# Altium PCB ui_layout-v1.1.PcbDoc
Units mil, origin at the board's own origin, x right, y up, seen from the top; angles counter-clockwise.
Board outline 3110 x 1889.76 mil, 4 copper layers (Signal Layer 1, Power Plane, GND Plane, Signal Layer 2), stack 61.811 mil thick; 42 components, 47 nets, 155 pads, 83 vias.
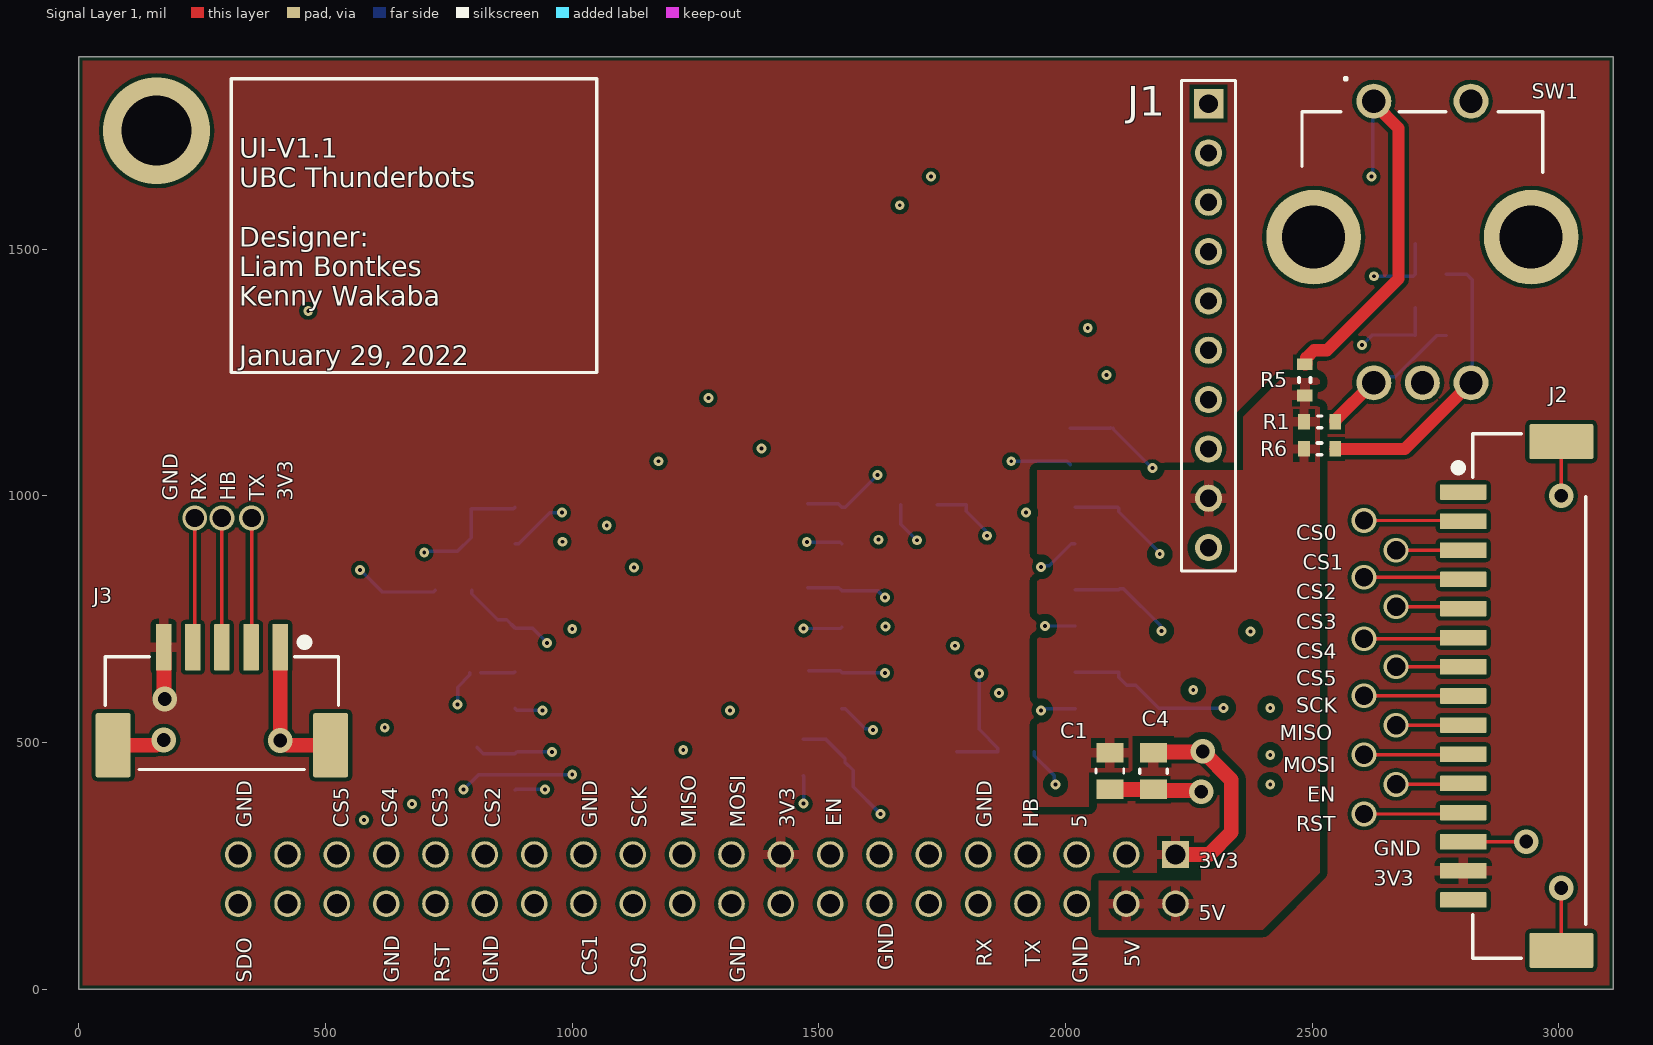
[diagram p0: Signal Layer 1 view]
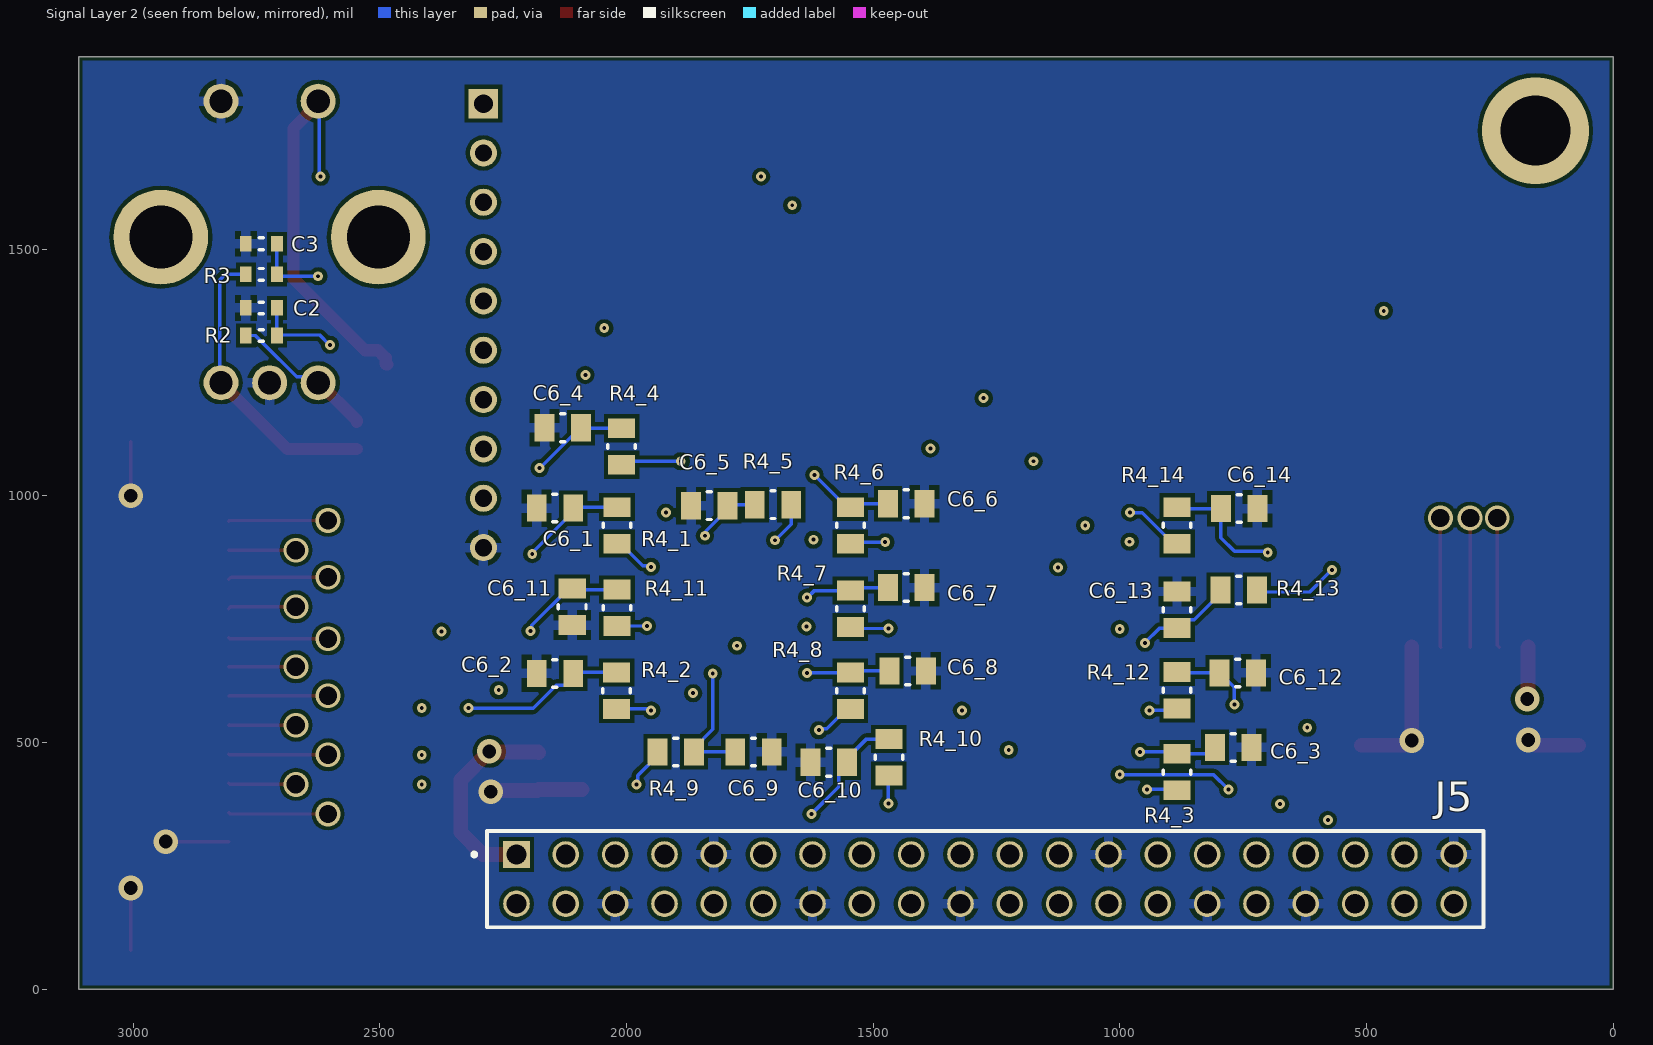
[diagram p1: Signal Layer 2 view, seen from below]
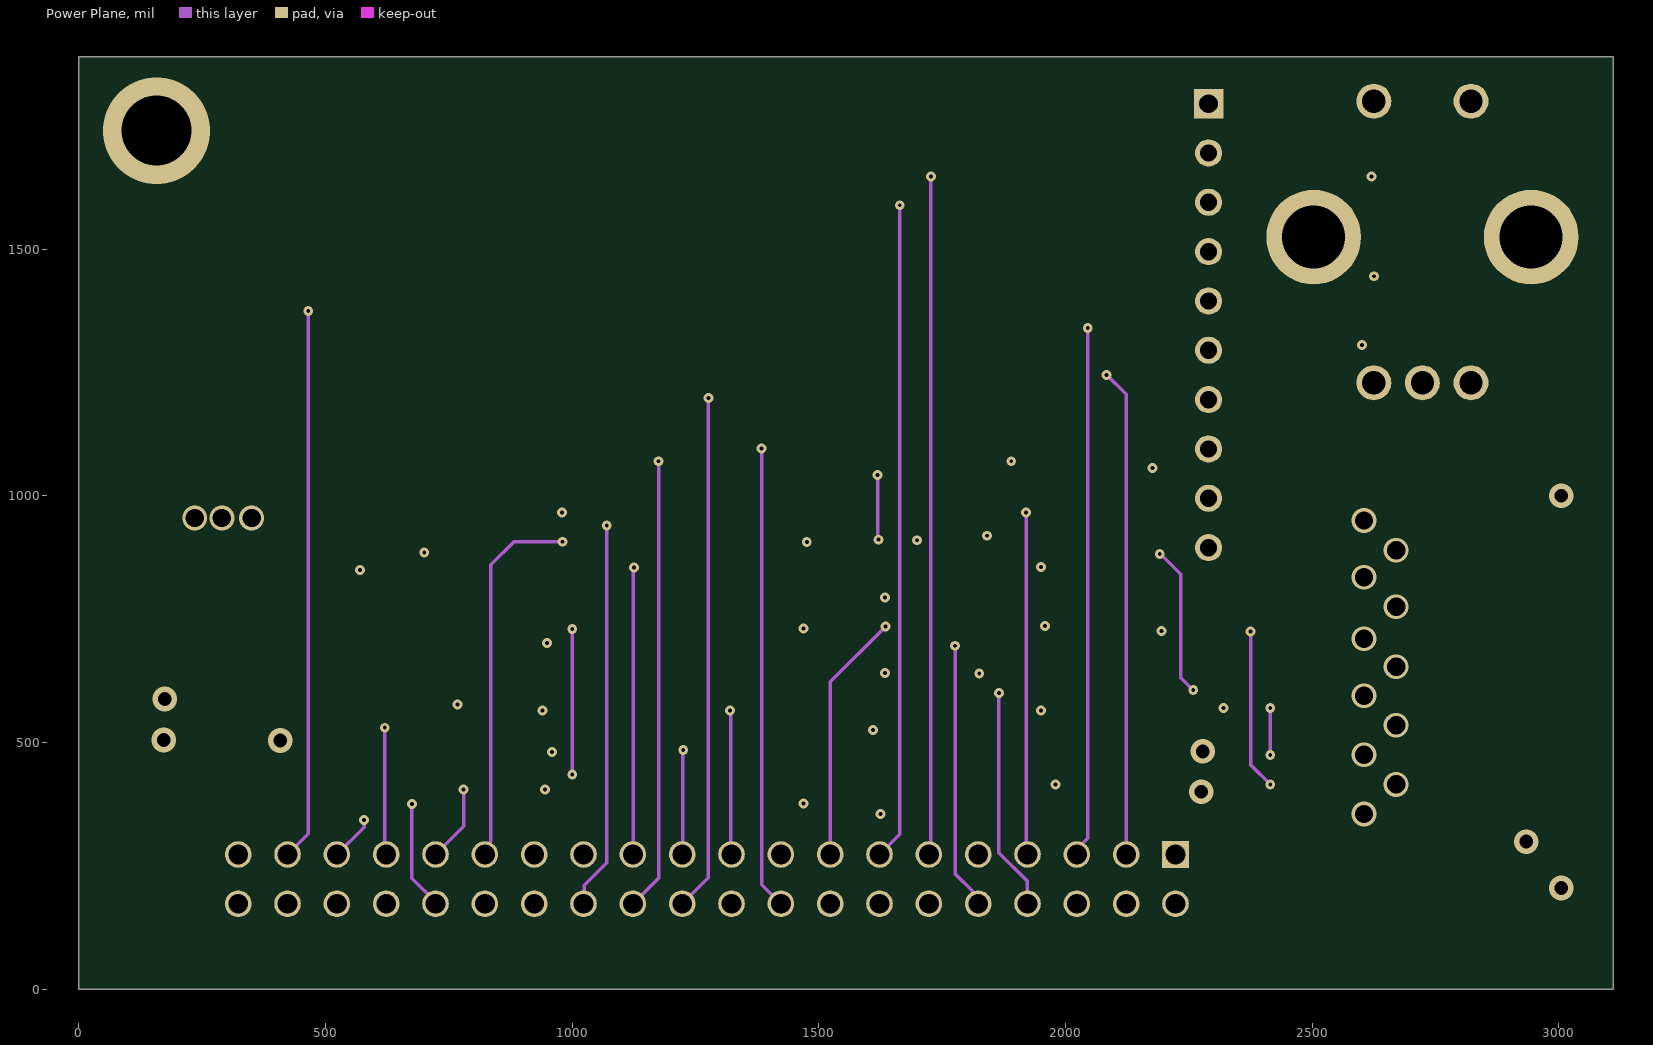
[diagram p2: Power Plane]
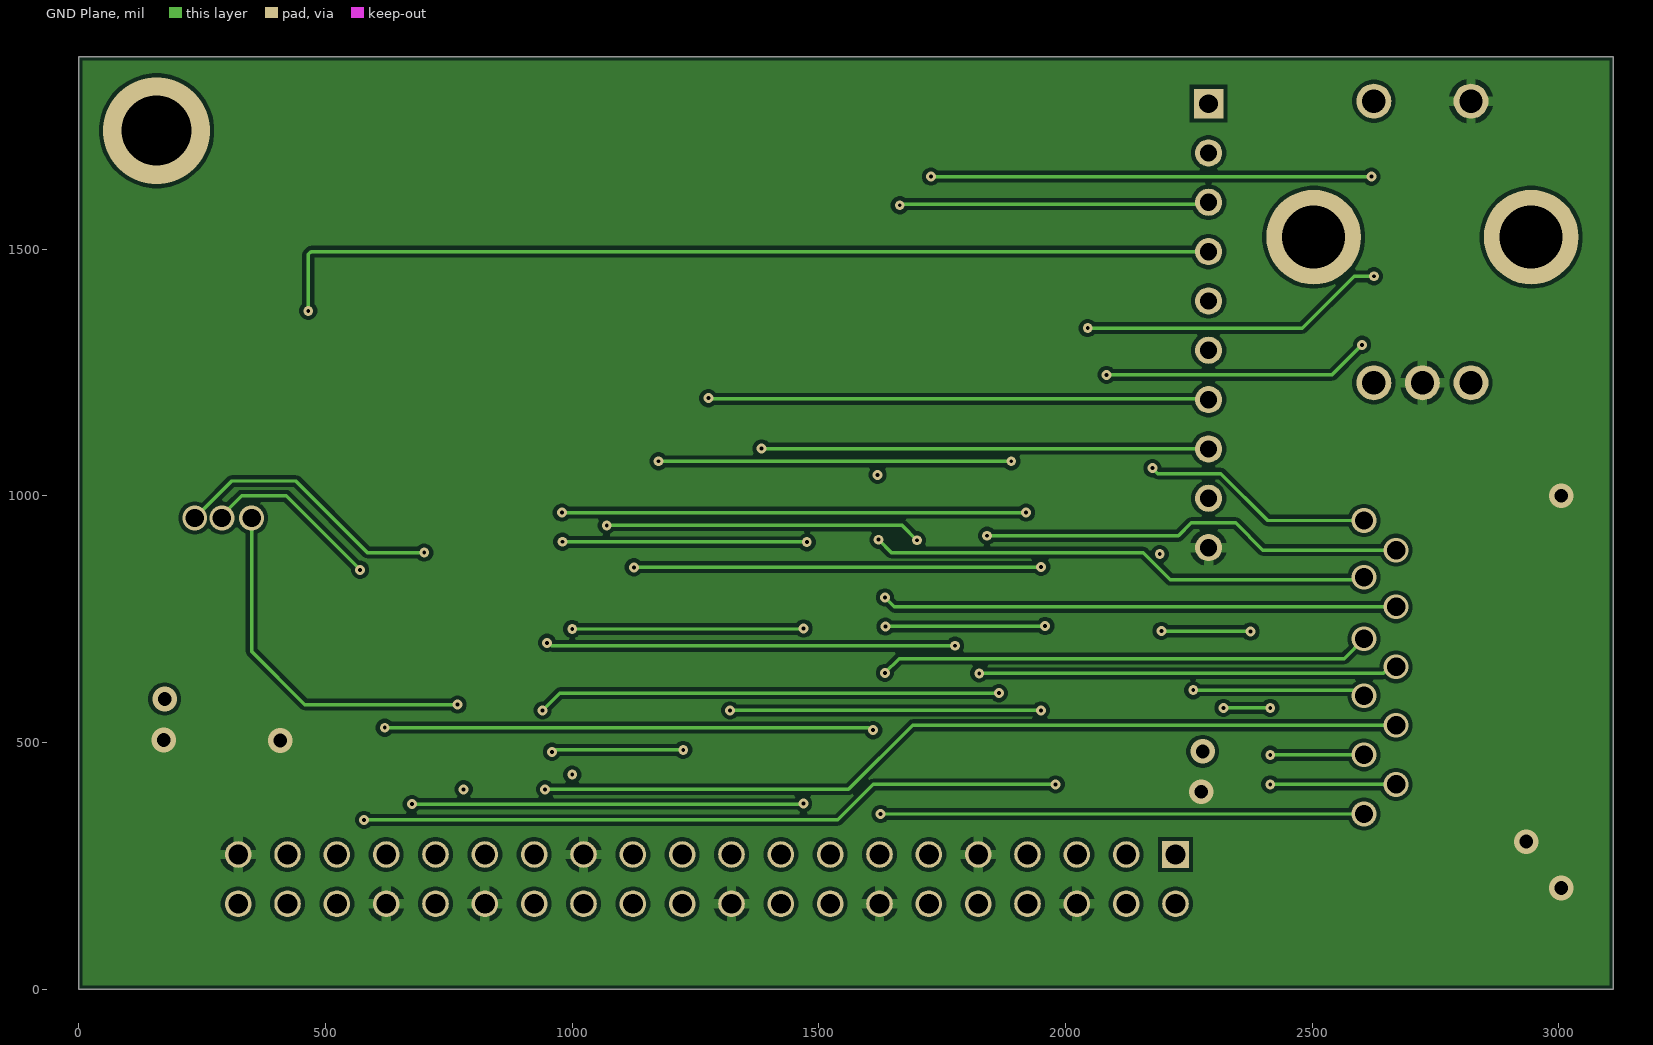
[diagram p3: GND Plane]

## Layer stack, top to bottom
Top Mask: solder mask 0.5906, Solder Resist, Dk 3.8
Signal Layer 1: signal copper 0.689
Dielectric 1: prepreg 3.937, 2313, Dk 4.05
Power Plane: signal copper 1.378
Core: core 49.8031, FR-4, Dk 4.5
GND Plane: signal copper 1.378
Dielectric 2: prepreg 3.937, 2313, Dk 4.05
Signal Layer 2: signal copper 0.689
Bottom Mask: solder mask 0.5906, Solder Resist, Dk 3.8

## Board outline
0,0 0,1889.76 3110,1889.76 3110,0

## Design rules (kind name [scope] priority, off if disabled: settings)
BoardOutlineClearance [All] p1: gap=7.87 ignorepadtopadclearanceinfootprint=FALSE except(15.75: Arc-SplitBarrior Arc-SplitContinuation Track-SplitBarrior Track-SplitContinuation SMDPad-SplitBarrior SMDPad-SplitContinuation THPad-SplitBarrior THPad-SplitContinuation Via-SplitBarrior Via-SplitContinuation Fill-SplitBarrior Fill-SplitContinuation Poly-SplitBarrior Poly-SplitContinuation Region-SplitBarrior Region-SplitContinuation Text-SplitBarrior Text-SplitContinuation)
Clearance "JETSON_5V Polygon Clearance" [(InNet('JETSON_5V')) AND InPolygon] p1: gap=15 ignorepadtopadclearanceinfootprint=FALSE
Clearance "POWER_5V Polygon Clearance" [(InNet('POWER_5V')) AND InPolygon] p2: gap=20 ignorepadtopadclearanceinfootprint=TRUE
Clearance [All] p3: gap=8 ignorepadtopadclearanceinfootprint=FALSE
HoleSize [All] p1: absolutevalues=TRUE maxlimit=248.03 minlimit=7.87 maxpercent=80.000 minpercent=20.000
MinimumAnnularRing [All] p1: minimumring=3
MinimumSolderMaskSliver [All] p1: minsoldermaskwidth=3.94
PolygonConnect PolygonConnect_1 [All] p1: thpad.connectstyle=Relief thpad.reliefconductorwidth=20 thpad.reliefentries=4 thpad.polygonreliefangle="90 Angle" thpad.airgapwidth=10 smdpad.connectstyle=Relief smdpad.reliefconductorwidth=20 smdpad.reliefentries=4 smdpad.polygonreliefangle="90 Angle" smdpad.airgapwidth=10 via.connectstyle=Direct via.reliefconductorwidth=20 via.reliefentries=4 via.polygonreliefangle="90 Angle" via.airgapwidth=10
RoutingCorners [All] p1: cornerstyle=Round minsetback=100 maxsetback=100
RoutingVias [All] p1: holewidth=19.68 width=39.37 viastyle="Through Hole" minholewidth=7.87 minwidth=17.72 maxholewidth=39.37 maxwidth=78.74
SilkToSilkClearance [All] p1: silktosilkclearance=3.94
SilkToSolderMaskClearance [IsPad] p1: minsilkscreentomaskgap=3.94 clearancetoexposedcopper=TRUE
SolderMaskExpansion [All] p1: expansion=4 istentingtop=FALSE
Width [All] p1: maxlimit=100 minlimit=7 preferedwidth=15
25 further rules are at their usual default settings.

## Classes and differential pairs
component class "Jetson Nano Interface": C1 C4 J4 J5
component class U_power: J3
component class U_motordriver: J2
component class "Rotary Encoder": C2 C3 R1 R2 R3 R5 R6 SW1
component class Display: J1
component class U_low-pass-filter_10: C6_11 R4_11
component class U_low-pass-filter_9: C6_10 R4_10
component class U_low-pass-filter_13: C6_14 R4_14
component class U_low-pass-filter_12: C6_13 R4_13
component class U_low-pass-filter_11: C6_12 R4_12
component class U_low-pass-filter_8: C6_9 R4_9
component class U_low-pass-filter_7: C6_8 R4_8
component class U_low-pass-filter_6: C6_7 R4_7
component class U_low-pass-filter_5: C6_6 R4_6
component class U_low-pass-filter_4: C6_5 R4_5
component class U_low-pass-filter_3: C6_4 R4_4
component class U_low-pass-filter_2: C6_3 R4_3
component class U_low-pass-filter_1: C6_2 R4_2
component class U_low-pass-filter_0: C6_1 R4_1
channel class low-pass-filter: CTRL_EN_FILTER HEARTBEAT_FILTER RESET_FILTER SPI1_CS0_FILTER SPI1_CS1_FILTER SPI1_CS2_FILTER SPI1_CS3_FILTER SPI1_CS4_FILTER SPI1_CS5_FILTER SPI1_MISO_FILTER SPI1_MOSI_FILTER SPI1_SCK_FILTER UART2_RX_FILTER UART2_TX_FILTER

## Components (designator, comment, footprint, x,y, rotation, side; value= is the part's Value field where it differs from the comment)
C1 "0.1uF 25V" 0805 2090,442 r90 top value=0.1uF
C2 "CAP 0.010uF 16V" 0603 2740,1381 r180 bottom value=0.010uF
C3 "CAP 0.010uF 16V" 0603 2740,1511 r180 bottom value=0.010uF
C4 "0.1uF 25V" 0805 2178,442 r90 top value=0.1uF
C6_1 "330pF 16V" 0805 2145,975 r180 bottom value=330pF (schematic designator C6)
C6_2 "330pF 16V" 0805 2145,640 r180 bottom value=330pF (schematic designator C6)
C6_3 "330pF 16V" 0805 770,490 r0 bottom value=330pF (schematic designator C6)
C6_4 "330pF 16V" 0805 2129,1138 r180 bottom value=330pF (schematic designator C6)
C6_5 "330pF 16V" 0805 1832,980 r180 bottom value=330pF (schematic designator C6)
C6_6 "330pF 16V" 0805 1433,984 r0 bottom value=330pF (schematic designator C6)
C6_7 "330pF 16V" 0805 1433,814 r0 bottom value=330pF (schematic designator C6)
C6_8 "330pF 16V" 0805 1430,645 r0 bottom value=330pF (schematic designator C6)
C6_9 "330pF 16V" 0805 1742.5,481 r0 bottom value=330pF (schematic designator C6)
C6_10 "330pF 16V" 0805 1590,460 r180 bottom value=330pF (schematic designator C6)
C6_11 "330pF 16V" 0805 2110,775 r90 bottom value=330pF (schematic designator C6)
C6_12 "330pF 16V" 0805 761,641 r0 bottom value=330pF (schematic designator C6)
C6_13 "330pF 16V" 0805 884,769 r270 bottom value=330pF (schematic designator C6)
C6_14 "330pF 16V" 0805 758,974 r0 bottom value=330pF (schematic designator C6)
J1 "1-87220-0" 1-87224-0_TYC 2290,1795 r90 top
J2 "BM15B-ZESS-TBT(LF)(SN)" "JST ZE SMT 15POS" 2914.45,564.72 r90 top
J3 "BM05B-ZESS-TBT(LF)(SN)" "JST ZE SMT 5POS" 290,585 r0 top
J5 "CN HDR 40POS" "CN HDR 40POS 0.1 TH" 1273,223 r0 bottom
R1 "RES 10k 1/8W - 1%" 0603 2515,1150 r180 top value=1
R2 "RES 10k 1/8W - 1%" 0603 2740,1325 r180 bottom value=1
R3 "RES 10k 1/8W - 1%" 0603 2740,1449 r0 bottom value=1
R4_1 "100" 0805 2019.18,940 r270 bottom value=1 (schematic designator R4)
R4_2 "100" 0805 2020,605 r270 bottom value=1 (schematic designator R4)
R4_3 "100" 0805 884,440 r270 bottom value=1 (schematic designator R4)
R4_4 "100" 0805 2010,1100 r270 bottom value=1 (schematic designator R4)
R4_5 "100" 0805 1703,982 r180 bottom value=1 (schematic designator R4)
R4_6 "100" 0805 1546,940 r270 bottom value=1 (schematic designator R4)
R4_7 "100" 0805 1546,771 r270 bottom value=1 (schematic designator R4)
R4_8 "100" 0805 1546,605 r270 bottom value=1 (schematic designator R4)
R4_9 "100" 0805 1900,481 r0 bottom value=1 (schematic designator R4)
R4_10 "100" 0805 1468,470 r270 bottom value=1 (schematic designator R4)
R4_11 "100" 0805 2019.18,773 r270 bottom value=1 (schematic designator R4)
R4_12 "100" 0805 884,606 r270 bottom value=1 (schematic designator R4)
R4_13 "100" 0805 759,809 r180 bottom value=1 (schematic designator R4)
R4_14 "100" 0805 884,940 r270 bottom value=1 (schematic designator R4)
R5 "RES 2k 1/8W" 0603 2485,1235 r90 top value=1
R6 "RES 10k 1/8W - 1%" 0603 2515,1095 r180 top value=1
SW1 "PEC12R-4220F-S0024" PEC12R4220FS0024 2625,1800 r0 top

## Footprints (in the part's own frame and the unit in brackets; to place one, negate y for a bottom-side part, rotate by r counter-clockwise, add the part's x,y. Pads: shape width x height; smd on the part's side, far side on the other; paste and mask are expansions set on the pad)
1-87224-0_TYC [mil]
  rect 60x60 hole 38 mask+0: 1(0,0)
  round 55 hole 35 mask+0: 2(-100,0) 3(-200,0) 4(-300,0) 5(-400,0) 6(-500,0) 7(-600,0) 8(-700,0) 9(-800,0) 10(-900,0)
  silkscreen extent -947,-55 47,55, body extent -950,-50 50,50, height 90
0603 [mm] "Chip Resistor, 2-Leads, Body 1.60x0.80mm, IPC High Density"
  rect 0.6x0.8 smd mask+0.1: 1(-0.8,0) 2(0.8,0)
  silkscreen extent -0.1,-0.3 0.1,0.3, body extent -0.8,-0.4 0.8,0.4, height 0.6
0805 [mil] "40 Position Header Connector 0.100\" (2.54mm) Through Hole"
  rect 40x55 smd: 1(-37,0) 2(37,0)
  silkscreen extent -4,-28 4,28, body extent -47,-28 47,28, height 24
"CN HDR 40POS 0.1 TH" [mm] "40 Position Header Connector 0.100\" (2.54mm) Through Hole"
  rect 1.37x1.37 hole 1.02: 01(24.13,-1.27)
  round 1.37 hole 1.02: 02(24.13,1.27) 03(21.59,-1.27) 04(21.59,1.27) 05(19.05,-1.27) 06(19.05,1.27) 07(16.51,-1.27) 08(16.51,1.27) 09(13.97,-1.27) 10(13.97,1.27) 11(11.43,-1.27) 12(11.43,1.27) 13(8.89,-1.27) 14(8.89,1.27) 15(6.35,-1.27) 16(6.35,1.27) 17(3.81,-1.27) 18(3.81,1.27) 19(1.27,-1.27) 20(1.27,1.27) 21(-1.27,-1.27) 22(-1.27,1.27) 23(-3.81,-1.27) 24(-3.81,1.27) 25(-6.35,-1.27) 26(-6.35,1.27) 27(-8.89,-1.27) 28(-8.89,1.27) 29(-11.43,-1.27) 30(-11.43,1.27) 31(-13.97,-1.27) 32(-13.97,1.27) 33(-16.51,-1.27) 34(-16.51,1.27) 35(-19.05,-1.27) 36(-19.05,1.27) 37(-21.59,-1.27) 38(-21.59,1.27) 39(-24.13,-1.27) 40(-24.13,1.27)
  silkscreen extent -25.66,-2.47 26.4,2.47
"JST ZE SMT 5POS" [mm] "5 POS HDR JST ZE"
  rrect10% 1.8x3.3 smd: 0(-5.6,-2.3) 0(5.6,-2.3)
  rrect10% 0.8x2.4 smd: 1(3,2.75) 2(1.5,2.75) 3(0,2.75) 4(-1.5,2.75) 5(-3,2.75)
  silkscreen extent -6,-3.55 6,3, body extent -6,-2.9 6,4.1, height 7.51
"JST ZE SMT 15POS" [mm] "15 POS HDR JST ZE"
  rrect10% 1.8x3.3 smd: 0(-12.35,-2.3) 0(13.85,-2.3)
  rrect10% 0.8x2.4 smd: 1(11.25,2.75) 2(9.75,2.75) 3(8.25,2.75) 4(6.75,2.75) 5(5.25,2.75) 6(3.75,2.75) 7(2.25,2.75) 8(0.75,2.75) 9(-0.75,2.75) 10(-2.25,2.75) 11(-3.75,2.75) 12(-5.25,2.75) 13(-6.75,2.75) 14(-8.25,2.75) 15(-9.75,2.75)
  silkscreen extent -12.75,-3.55 14.26,3, body extent -12.75,-3.55 14.25,3.45, height 7.6
PEC12R4220FS0024 [mm]
  round 1.8 hole 1.2: 1(0,0) 2(5,0) A1(0,-14.5) B1(5,-14.5) C1(2.5,-14.5)
  round 4.875 hole 3.25: MH1(8.1,-7) MH2(-3.1,-7)
  silkscreen extent -3.7,-3.65 8.7,1.2, body extent -4.61,-15 9.62,0.5, height 20.1

## Part data
C1 C4: library part "CAP 0.1uF 25V", "Default Symbol for Capacitors", Operating Temperature="-55°C ~ 125°C", Rating=25V, Temperature Coefficient=X7R, Tolerance=10%, Part Number="CAP 0.1uF 25V"
C2 C3: "Default Symbol for Capacitors", Operating Temperature="-55°C ~ 125°C", Rating=16V, Temperature Coefficient=X5R, Tolerance=10%, Part Number="CAP 0.010uF 16V"
C6_1 C6_2 C6_3 C6_4 C6_5 C6_6 C6_7 C6_8 C6_9 C6_10 C6_11 C6_12 C6_13 C6_14: library part "CAP 330pF 16V", "Default Symbol for Capacitors", Rating=16V, Temperature Coefficient=X5R, Tolerance=10%, Part Number="CAP 330pF 16V"
J1: "No Description Available", Mfr_Name="TE Connectivity", Copyright="Copyright (C) 2021 Ultra Librarian. All rights reserved.", Manufacturer_Part_Number=1-87220-0, RefDes=RefDes, Type=DEV
J2: library part "CN 15POS JST ZE SMT", "CONN HEADER VERT SMD 15POS ZE", Supplier Part Number 1=455-4211-1-ND, Supplier 1=Digi-Key
J3: library part "CN 5POS JST ZE SMT", "CONN HEADER VERT SMD 5POS ZE", Supplier Part Number 1=455-2383-1-ND, Manufacturer Part Number=BM05B-ZESS-TBT(LF)(SN), Part Number="CN 5POS JST ZE SMT", Pin Count=5, Supplier 1=Digi-Key, Supplier URL 1=https://www.digikey.ca/en/products/detail/jst-sales-america-inc/BM05B-ZESS-TBT-LF-SN/1886989?s=N4IgTCBcDaIEIFkAMBWOBaAWgUQMq-QBU5CAKAGQDEBKU3AOWpAF0BfIA
J5: "40 Position Header Connector", Supplier Part Number 1=S6104-ND, Part Number="CN HDR 40POS", Pin Count=40, Supplier 1=Digi-Key, Supplier URL 1=https://www.digikey.ca/en/products/detail/sullins-connector-solutions/PPTC202LFBN-RC/807240?s=N4IgTCBcDaIMoDYCMAGALAWgHIBEQF0BfIA
R1 R2 R3 R5 R6: "Default Resistor Symbol", Package=0805, Power (Watts)=0.125W, Tolerance=5%
  R1 R2 R3 R6: Part Number="RES 10k 1/8W - 1%"
  R5: Part Number="RES 2k 1/8W"
R4_1 R4_2 R4_3 R4_4 R4_5 R4_6 R4_7 R4_8 R4_9 R4_10 R4_11 R4_12 R4_13 R4_14: library part "RES 100.0 1/8W", "Default Resistor Symbol", Package=0805, Power (Watts)=0.125W, Tolerance=5%, Part Number="RES 100.0 1/8W"
SW1: library part PEC12R4220FS0024, "Rotary Encoder", Manufacturer_Name=Bourns, Mouser Part Number=652-PEC12R-4220F-S24, Supplier Part Number 1=PEC12R-4220F-S0024-ND, Arrow Part Number=PEC12R-4220F-S0024, Arrow Price/Stock=https://www.arrow.com/en/products/pec12r-4220f-s0024/bourns, Datasheet Link=https://componentsearchengine.com/Datasheets/5/PEC12R-4220F-S0024.pdf, Height=20mm, Manufacturer_Part_Number=PEC12R-4220F-S0024, Mouser Price/Stock=https://www.mouser.co.uk/ProductDetail/Bourns/PEC12R-4220F-S0024?qs=Zq5ylnUbLm7u%2FuPQvUoR4Q%3D%3D, Part Number=PEC12R4220FS0024, Supplier 1=Digi-key, Supplier URL 1=https://www.digikey.ca/en/products/detail/bourns-inc/PEC12R-4220F-S0024/4499653

## Via types
v1: diameter 20, hole 7.87, Signal Layer 1 to Signal Layer 2, 60 vias
v2: diameter 50, hole 37.4, Signal Layer 1 to Signal Layer 2, 14 vias
v3: diameter 50, hole 28, Signal Layer 1 to Signal Layer 2, 8 vias
v4: diameter 216.54, hole 141.73, Signal Layer 1 to Signal Layer 2, 1 vias

## Nets (pads, with @x,y where several pads share a name; then routed paths per layer and width w, separated by ;. In a path a pad name is that pad's centre, name@x,y a point inside that pad or via, vN(x,y) a via of type N, cw(c..) or ccw(c..) an arc to the next point about the centre after c; other vN are vias at no path point)
CTRL_EN: C6_11.2 J2.11 R4_11.1 | length 1116.6
  Signal Layer 1 w7: v2(2670,415) 2804.09,415 J2.11
  Power Plane w7: v1(2375,725) 2375,455 v1(2415,415)
  GND Plane w7: v1(2194.44,726.08) 2194.98,725.54 2374.46,725.54 v1(2375,725) ; v1(2415,415) v2(2670,415)
  Signal Layer 2 w7: R4_11.1 2108,810 C6_11.2 2117.5,812 2191.95,737.55 2191.95,728.57 v1(2194.44,726.08)
HEARTBEAT: J5.07 R4_14.2 | length 1756.3
  Power Plane w7: v1(1920,966) 1920,276 J5.07
  GND Plane w7: v1(979,966) v1(1920,966)
  Signal Layer 2 w7: R4_14.2 891.5,903 954.5,966 v1(979,966)
I2C_1_SCL: J5.28
I2C_1_SDA: J5.27
I2C_2_SCL: C3.2 J5.05 R3.1 | length 1846.6
  Power Plane w7: J5.05@2022.83,273.23 2022.83,283.38 2045,305.55 v1(2045,1340)
  GND Plane w7: v1(2045,1340) 2480,1340 2585,1445 v1(2625,1445)
  Signal Layer 2 w7: v1(2625,1445) 2704.5,1445 R3.1 C3.2
I2C_2_SDA: C2.2 J5.03 R2.2 | length 1701.9
  Power Plane w7: v1(2083.35,1245) 2122.83,1205.52 J5.03@2122.83,273
  GND Plane w7: v1(2083.35,1245) 2540,1245 v1@2600,1305
  Signal Layer 2 w7: v1(2601.08,1306.08) 2602.08,1306.08 2622,1326 2707.5,1326 R2.2 C2.2
I2S_4_SCLK: J5.12
I2S_4_SDIN: J5.38
I2S_4_SDOUT: J5.40
JETSON_3V3: C4.2 J2.14 J3.5 J5.01 J5.17 | length 526.9
  Signal Layer 1 w30: J3.5 172.64,692.52 172.64,589.36 v3(173.89,588.11) ; C4.2 2179.5,480.5 2276.5,480.5 v3(2278,482) 2336,424 2336,318 2291,273 J5.01
JETSON_5V: C1.2 J1.9 J5.02 J5.04 R1.2 R5.1 R6.2
JETSON_GND: C1.1 C2.1 C3.1 C4.1 C6_1.1 C6_2.1 C6_3.1 C6_4.1 C6_5.1 C6_6.1 C6_7.1 C6_8.1 C6_9.1 C6_10.1 C6_11.1 C6_12.1 C6_13.1 C6_14.1 J1.10 J2.0 J2.13 J3.0 J3.1 J5.06 J5.09 J5.14 J5.20 J5.25 J5.30 J5.34 J5.39 SW1.2 SW1.C1 | length 953.9
  Signal Layer 1 w7: J2.13 v3(2933.98,298.98) ; J2.0@3005,78.5 v3(3005,205) ; v3(3005,1000) J2.0@3005,1110
  Signal Layer 1 w30: J3.0@69.53,494.45 156.04,494.45 166.59,505 v3(172,505) ; J3.1 408.06,693.21 408.06,504.06 v3(408,504) 413.41,504 422.96,494.45 J3.0@510.47,494.45 ; C1.1 C4.1 2180.5,402.5 2272.5,402.5 v3(2275,400)
JETSON_HEARTBEAT: C6_14.2 J3.4 R4_14.1 | length 1076.2
  Signal Layer 1 w7: J3.4 235,697.32 v2(235,955)
  GND Plane w7: v2(235,955) 310,1030 440,1030 585,885 v1(700,885)
  Signal Layer 2 w7: v1(700,885) 702.49,887.49 767.49,887.49 795,915 C6_14.2 881,974 R4_14.1
MOTORDRIVER_CTRL_EN: J5.15 R4_11.2 | length 892.9
  Power Plane w7: J5.15@1522.83,273.23 1522.83,622.83 v1(1635,735)
  GND Plane w7: v1(1635,735) 1635.54,735.54 1958.15,735.54 v1(1958.69,736.08)
  Signal Layer 2 w7: v1(1958.69,736.08) 2019.1,736.08 R4_11.2
NetR1_1: R1.1 R2.1 SW1.A1 | length 299
  Signal Layer 1 w25: R1.1 2546.5,1152.56 2623.07,1229.13 SW1.A1
  Signal Layer 2 w7: SW1.A1 2637.22,1241.35 2668.68,1241.35 2737.13,1309.81 2752.33,1325 R2.1
NetR3_2: R3.2 R6.1 SW1.B1 | length 597.7
  Signal Layer 1 w25: R6.1 2687.72,1095 SW1.B1
  Signal Layer 2 w7: R3.2 2813,1449 2824,1438 2824,1231.28 SW1.B1
R\S\T\: C6_10.2 J2.12 R4_10.1 | length 1426.1
  Signal Layer 1 w7: v2(2605,355) 2803.15,355 J2.12
  GND Plane w7: v1(1625,355) v2(2605,355)
  Signal Layer 2 w7: R4_10.1 1513.5,507 1553,467.5 C6_10.2 1569.5,443.5 1569.5,410.5 v1(1625,355)
RESET: J5.32 R4_10.2 | length 1073.9
  Power Plane w7: v1(675,375) 675,225 722.83,177.17 J5.32@722.83,173.23
  GND Plane w7: v1(675,375) v1@1470,375
  Signal Layer 2 w7: R4_10.2 1468.92,432.08 v1(1468.92,376.08)
SCREEN_RESET: J1.8 J5.18 | length 1845.6
  Power Plane w7: v1(1384,1096) 1384,212 J5.18
  GND Plane w7: v1(1384,1096) 1384.5,1095.5 2289.5,1095.5 J1.8
SPI_1_CS0: J5.24 R4_4.2 | length 1756.5
  Power Plane w7: J5.24@1122.83,173.23 1123.23,173.23 1175,225 v1(1175,1070)
  GND Plane w7: v1(1175,1070) v1(1890,1070)
  Signal Layer 2 w7: v1(1890,1070) 2003,1070 R4_4.2
SPI_1_CS0_FILTER: C6_4.2 J2.2 R4_4.1 | length 871.3
  Signal Layer 1 w7: v2(2605,950) 2804.76,950 J2.2
  GND Plane w7: v1(2176.08,1056.08) 2187.17,1045 2315,1045 2410,950 v2(2605,950)
  Signal Layer 2 w7: R4_4.1 2091,1137 C6_4.2 ; C6_4.2@2096.5,1137 2096.5,1135.06 2175.48,1056.08 v1(2176.08,1056.08)
SPI_1_CS1: J5.26 R4_5.2 | length 1513.4
  Power Plane w7: J5.26 1024.47,174.47 1024.47,210.47 1070,256 v1(1070,940)
  GND Plane w7: v1(1070,940) 1668.58,940 v1(1698.75,909.83)
  Signal Layer 2 w7: R4_5.2 1666,942.58 v1(1698.75,909.83)
SPI_1_CS1_FILTER: C6_5.2 J2.3 R4_5.1 | length 1138
  Signal Layer 1 w7: v2(2670,890) 2805.71,890 J2.3
  GND Plane w7: v1(1840.97,919.01) 2229.01,919.01 2255,945 2345,945 2400,890 v2(2670,890)
  Signal Layer 2 w7: R4_5.1 1798.5,982 1798.5,969 1838.49,929.01 1838.49,921.5 v1(1840.97,919.01)
SPI_1_CS2: J5.29 R4_6.2 | length 1323.9
  Power Plane w7: J5.29@822.83,273.23 822.83,286.47 835,298.64 835,860 881.98,906.98 v1(980,906.98)
  GND Plane w7: v1(980,906.98) 980.45,906.53 1475.12,906.53 v1(1475.56,906.08)
  Signal Layer 2 w7: v1(1475.56,906.08) 1542.92,906.08 R4_6.2
SPI_1_CS2_FILTER: C6_6.2 J2.4 R4_6.1 | length 1527.2
  Signal Layer 1 w7: v2(2605,835) 2801.65,835 J2.4
  Power Plane w7: v1(1618.97,1042.57) 1618.97,911.03 v1@1620,910
  GND Plane w7: v1(1621.08,911.08) 1647.17,885 2157.5,885 2212.5,830 2600,830 v2(2605,835)
  Signal Layer 2 w7: C6_6.2@1477.5,984 1539,984 R4_6.1 1553.5,977 1618.97,1042.47 v1(1618.97,1042.57)
SPI_1_CS3: J5.31 R4_7.2 | length 1231.4
  Power Plane w7: J5.31@722.83,273.23 723.23,273.23 780,330 v1(780,405) ; v1(1000,435) v1(1000,730)
  GND Plane w7: v1(1000,730) v1@1470,730
  Signal Layer 2 w7: v1(780,405) 810,435 v1(1000,435) ; v1(1468.92,731.08) 1543.08,731.08 R4_7.2
SPI_1_CS3_FILTER: C6_7.2 J2.5 R4_7.1 | length 1346.3
  Signal Layer 1 w7: v2(2670,775) 2802.6,775 J2.5
  GND Plane w7: v1(1633.92,794) 1652.92,775 v2(2670,775)
  Signal Layer 2 w7: C6_7.2@1477.5,814 1540,814 R4_7.1 1618.93,808 1632.93,794 v1(1633.92,794)
SPI_1_CS4: J5.33 R4_8.2 | length 1331.8
  Power Plane w7: v1(620,530) 620,276.06 J5.33@622.83,273.23
  GND Plane w7: v1(620,530) 1600.94,530 1605.94,525 v1(1610,525)
  Signal Layer 2 w7: R4_8.2 1553.5,568 1594.01,527.49 1607.51,527.49 v1(1610,525)
SPI_1_CS4_FILTER: C6_8.2 J2.6 R4_8.1 | length 1358.3
  Signal Layer 1 w7: v2(2605,710) 2803.82,710 J2.6
  GND Plane w7: v1(1633.92,641.08) 1662.83,670 2565,670 v2(2605,710)
  Signal Layer 2 w7: C6_8.2@1479,645 1543,645 R4_8.1 1546.92,641.08 v1(1633.92,641.08)
SPI_1_CS5: J5.35 R4_9.2 | length 1608.3
  Power Plane w7: J5.35 578.1,328.1 578.1,342.96 v1(578.16,343.03)
  GND Plane w7: v1(578.16,343.03) 1538.03,343.03 1610,415 v1(1980,415)
  Signal Layer 2 w7: R4_9.2 1937,473.5 1977.51,432.99 1977.51,417.49 v1(1980,415)
SPI_1_CS5_FILTER: C6_9.2 J2.7 R4_9.1 | length 1244.9
  Signal Layer 1 w7: v2(2670,653.31) J2.7
  GND Plane w7: v1(1825,640) 2644.52,640 2657.82,653.31 v2(2670,653.31)
  Signal Layer 2 w7: C6_9.2 R4_9.1 1863,488.5 1825,526.5 v1(1825,640)
SPI_1_MISO: J2.9 R4_3.2 | length 1977.7
  Signal Layer 1 w7: v2(2670,535) 2804.21,535 2805.29,536.08 J2.9
  GND Plane w7: v1(945,405) 1560,405 1690,535 v2(2670,535)
  Signal Layer 2 w7: R4_3.2 886,405 v1(945,405)
SPI_1_MISO_FILTER: C6_3.2 J5.21 R4_3.1 | length 638.9
  Power Plane w7: J5.21 1224,274 1224,484 v1(1225,485)
  GND Plane w7: v1@960,480 965,485 v1(1225,485)
  Signal Layer 2 w7: C6_3.2 820,477 R4_3.1 888.08,481.08 v1(958.92,481.08)
SPI_1_MOSI: J5.19 R4_2.2 | length 994.5
  Power Plane w7: v1(1320,565) 1321.5,563.5 1321.5,274.5 J5.19
  GND Plane w7: v1(1320,565) v1(1950,565)
  Signal Layer 2 w7: v1(1950,565) 1953.52,565 1956.52,568 R4_2.2
SPI_1_MOSI_FILTER: C6_2.2 J2.10 R4_2.1 | length 915.8
  Signal Layer 1 w7: v2(2605,475) 2805.04,475 J2.10
  Power Plane w7: v1(2415,475) v1(2415,570)
  GND Plane w7: v1(2320,570) v1(2415,570) ; v1(2415,475) v2(2605,475)
  Signal Layer 2 w7: R4_2.1 C6_2.2@2108,642 ; C6_2.2 2108,632.5 2124.5,616 2142.24,616 2189.15,569.08 2319.08,569.08 v1(2320,570)
SPI_1_SCK: J5.23 R4_1.2 | length 1496.7
  Power Plane w7: J5.23@1122.83,273.23 1123.92,274.31 1123.92,853.92 v1(1125,855)
  GND Plane w7: v1(1125,855) 1125.54,855.54 1950.02,855.54 v1(1950.56,856.08)
  Signal Layer 2 w7: v1(1950.56,856.08) 1953.05,858.57 1967.25,858.57 2011.68,903 R4_1.2
SPI_1_SCK_FILTER: C6_1.2 J2.8 R4_1.1 | length 1073
  Signal Layer 1 w7: v2(2605,595) 2805.43,595 J2.8
  Power Plane w7: v1(2190.94,881.96) 2193.04,881.96 2233.92,841.08 2233.92,631.08 v1(2258.92,606.08)
  GND Plane w7: v1(2258.92,606.08) 2588.92,606.08 v2@2602.5,592.5
  Signal Layer 2 w7: R4_1.1 2106,977 C6_1.2 2108,967.5 2190.94,884.56 v1(2190.94,881.96)
SPI_2_CS1: J5.16
SPI_2_MISO: J1.7 J5.22 | length 2062.2
  Power Plane w7: J5.22 1276,226 v1(1276,1198)
  GND Plane w7: v1(1276,1198) 1277.5,1196.5 2288.5,1196.5 J1.7
SPI_2_MOSI: J1.4 J5.37 | length 3061.1
  Power Plane w7: J5.37 465,315 v1(465,1375)
  GND Plane w7: v1(465,1375) 465,1489.4 470.6,1495 J1.4
SPI_2_SCK: J1.3 J5.13 | length 1962.9
  Power Plane w7: J5.13 1664,314 v1(1664,1589)
  GND Plane w7: v1(1664,1589) 1666.49,1591.49 2286.49,1591.49 J1.3
  Signal Layer 2 w7: J1.3@2288,1596 J1.3@2289,1597
UART_2_CTS: J5.36
UART_2_RTS: J5.11 R5.2 SW1.1 | length 3073.4
  Signal Layer 1 w25: R5.2 2487.56,1266.5 2488.25,1267.18 2488.25,1279.67 2503.58,1295 2530,1295 2675,1440 2675,1745 2625,1795 SW1.1
  Power Plane w7: J5.11@1722.83,273.23 1727.13,277.52 v1(1727.13,1647.13)
  GND Plane w7: v1@1727.29,1646.97 v1(2620,1646.97)
  Signal Layer 2 w7: v1(2620,1646.97) 2622.49,1649.46 2622.49,1797.49 SW1.1
UART_2_RX: J3.3 R4_13.2 | length 797.7
  Signal Layer 1 w7: J3.3 v2(290,955)
  GND Plane w7: v2(290,955) 290,958.52 295,963.51 295,965 330,1000 420,1000 v1(570,850)
  Signal Layer 2 w7: v1(570,850) 615,805 718,805 R4_13.2
UART_2_RX_FILTER: C6_13.2 J5.10 R4_13.1 | length 1573.4
  Power Plane w7: v1(1776,696) 1776,234 1810.63,199.37 1810.63,198.62 1822.83,186.41 J5.10@1822.83,173.23
  GND Plane w7: v1(949,702) 952.52,702 958.52,696 v1(1776,696)
  Signal Layer 2 w7: R4_13.1 796,801.5 849,748.5 867.5,748.5 C6_13.2 919,732 v1(949,702)
UART_2_TX: J5.08 R4_12.2 | length 1447.9
  Power Plane w7: v1(1865,600) 1865,276.14 1922.83,218.3 J5.08@1922.83,173.23
  GND Plane w7: v1(940,565) 975,600 v1(1865,600)
  Signal Layer 2 w7: R4_12.2 888,565 v1(940,565)
UART_2_TX_FILTER: C6_12.2 J3.2 R4_12.1 | length 1139.4
  Signal Layer 1 w7: J3.2 350,694.21 v2(350,955)
  GND Plane w7: v2(350,955) 350,685 458.18,576.82 v1(767.65,576.82)
  Signal Layer 2 w7: v1(767.65,576.82) 767.65,612.22 792.5,637.06 C6_12.2@792.5,641 ; C6_12.2@814.5,641 882,641 R4_12.1
pads on no net: J1.1 J1.2 J1.5 J1.6 J2.1 J2.15 SW1.MH1 SW1.MH2
copper on no net:
  other v4: 157.48,1740.16

## Polygon pours and split planes (outlines as drawn)
JETSON_3V3 on Signal Layer 1 "JETSON_3V3_L01_P007" (solid, pour order 7): 0,0 0,1889.76 3110,1889.76 3110,0
JETSON_5V on Signal Layer 1 "JETSON_5V_L01_P004" (solid, pour order 4): 2360,1052 2360,1160 2440,1240 2515,1240 2515,235.55 2400,120.55 2066.97,120.55 2066.97,220 2275,220 2275,370 1943,370 1943,1052
JETSON_GND on Signal Layer 2 "JETSON_GND_L04_P001" (solid, pour order 1): 0,0 0,1889.76 3110.24,1889.76 3110.24,0
JETSON_GND on GND Plane "JETSON_GND_L03_P010" (solid, pour order 10): 5,1885 5,5 3105,5 3105,1885

## Silkscreen, mask and mechanical layers (free items; w line width, h text height)
Top Overlay:
  lines w7: 309.29,1249.96 1050,1249.96 1050,1845 309.29,1845 309.29,1249.96
  text "UI-V1.1 / UBC Thunderbots /  / Designer: / Liam Bontkes / Kenny Wakaba /  / January 29, 2022" at 325,1265 h40
  text "GND" at 200,990 h30 r90
  text "RX" at 258.49,990 h30 r90
  text "HB" at 316.97,990 h30 r90
  text "TX" at 375.46,990 h30 r90
  text "3V3" at 433.95,990 h30 r90
  text "CS0" at 2467.67,910 h30
  text "CS1" at 2481,850 h30
  text "CS2" at 2467.67,790 h30
  text "CS3" at 2467.67,730 h30
  text "CS4" at 2467.67,670 h30
  text "CS5" at 2467.67,615 h30
  text "SCK" at 2467.67,560 h30
  text "MISO" at 2434.35,505 h30
  text "MOSI" at 2441.01,440 h30
  text "EN" at 2490,380 h30
  text "EN" at 1545,330 h30 r90
  text "GND" at 350,326.78 h30 r90
  text "CS5" at 547.24,326.77 h30 r90
  text "CS4" at 645.67,326.77 h30 r90
  text "CS3" at 748.03,326.77 h30 r90
  text "CS2" at 854.33,326.77 h30 r90
  text "GND" at 1051.18,326.77 h30 r90
  text "SCK" at 1151.18,326.77 h30 r90
  text "MISO" at 1251.18,326.77 h30 r90
  text "MOSI" at 1351.18,326.77 h30 r90
  text "3V3" at 1451.18,326.77 h30 r90
  text "GND" at 1850.39,326.77 h30 r90
  text "HB" at 1944.88,326.77 h30 r90
  text "5" at 2043.31,326.77 h30 r90
  text "RST" at 2467.67,320 h30
  text "GND" at 2625,270 h30
  text "3V3" at 2270,245 h30
  text "3V3" at 2625,210 h30
  text "5V" at 2270,140 h30
  text "RX" at 1850.39,44.98 h30 r90
  text "TX" at 1948.82,44.98 h30 r90
  text "5V" at 2150,44.02 h30 r90
  text "GND" at 1650.99,37.96 h30 r90
  text "CS1" at 1051.18,26.66 h30 r90
  text "SDO" at 350,13.33 h30 r90
  text "GND" at 649.6,13.33 h30 r90
  text "RST" at 751.97,13.33 h30 r90
  text "GND" at 850.39,13.33 h30 r90
  text "CS0" at 1149.6,13.33 h30 r90
  text "GND" at 1350.39,13.33 h30 r90
  text "GND" at 2045,12.37 h30 r90
Mechanical 1:
  lines w7: 0,0 0,1889.76 ; 3.5,5 3943.5,5 3943.5,1894.76 3.5,1894.76